# Altium PCB PCB_motor_driver.PcbDoc
Units mm, origin at the board's own origin, x right, y up, seen from the top; angles counter-clockwise.
Board outline 35.18 x 21.08 mm, 2 copper layers (Top Layer, Bottom Layer); 7 components, 8 nets, 20 pads, 2 vias.
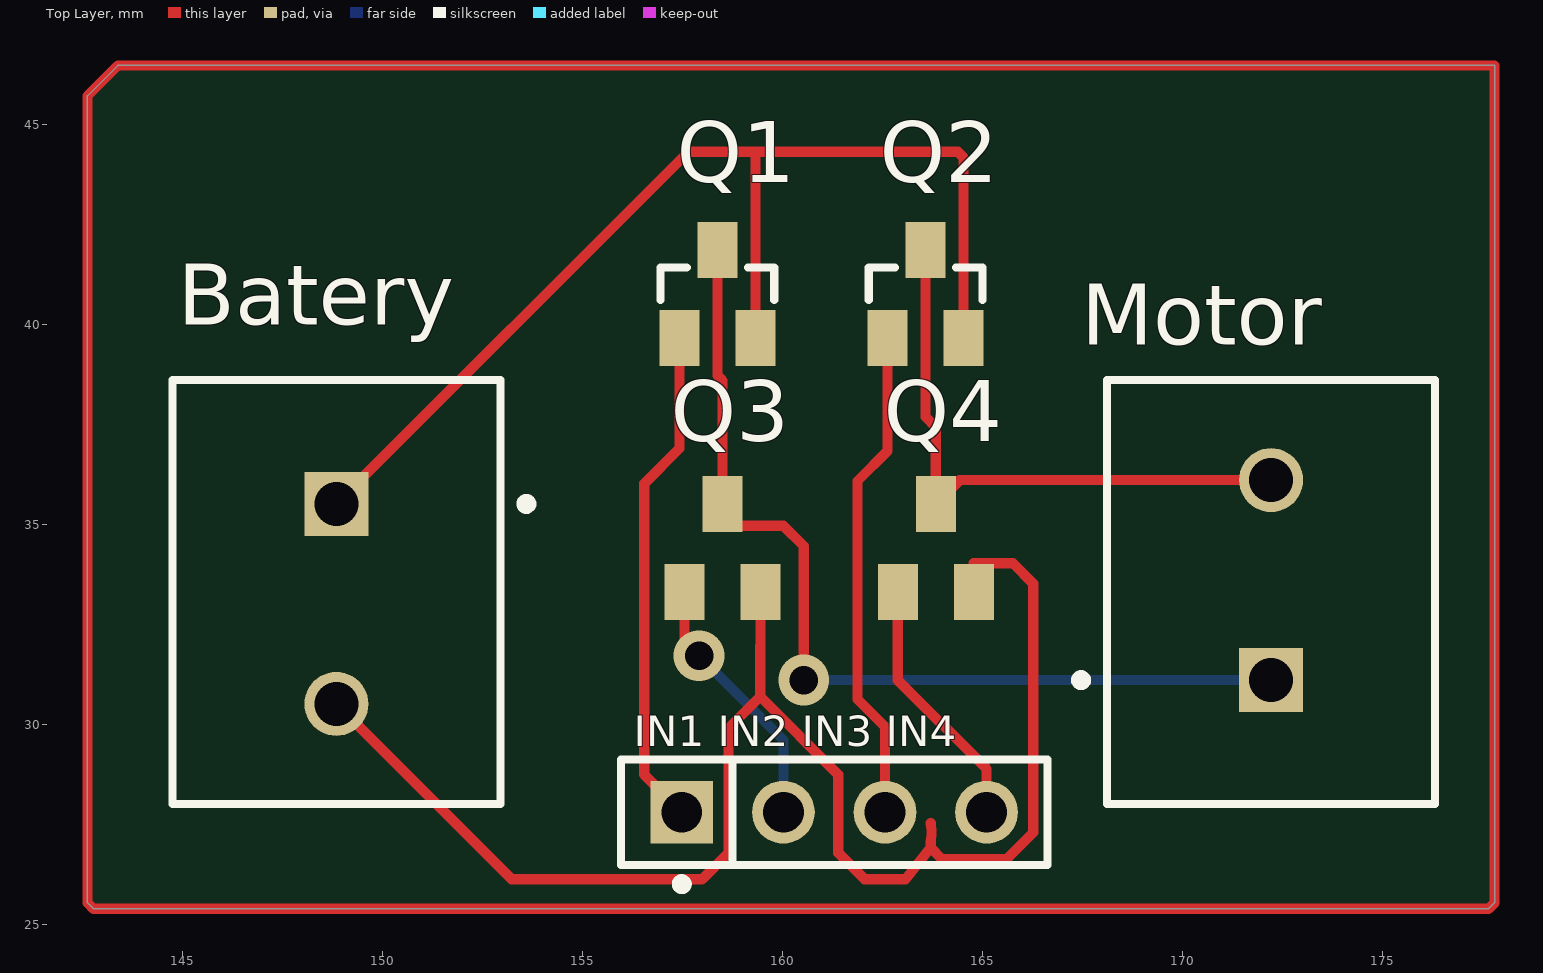
[diagram p0: Top Layer view]
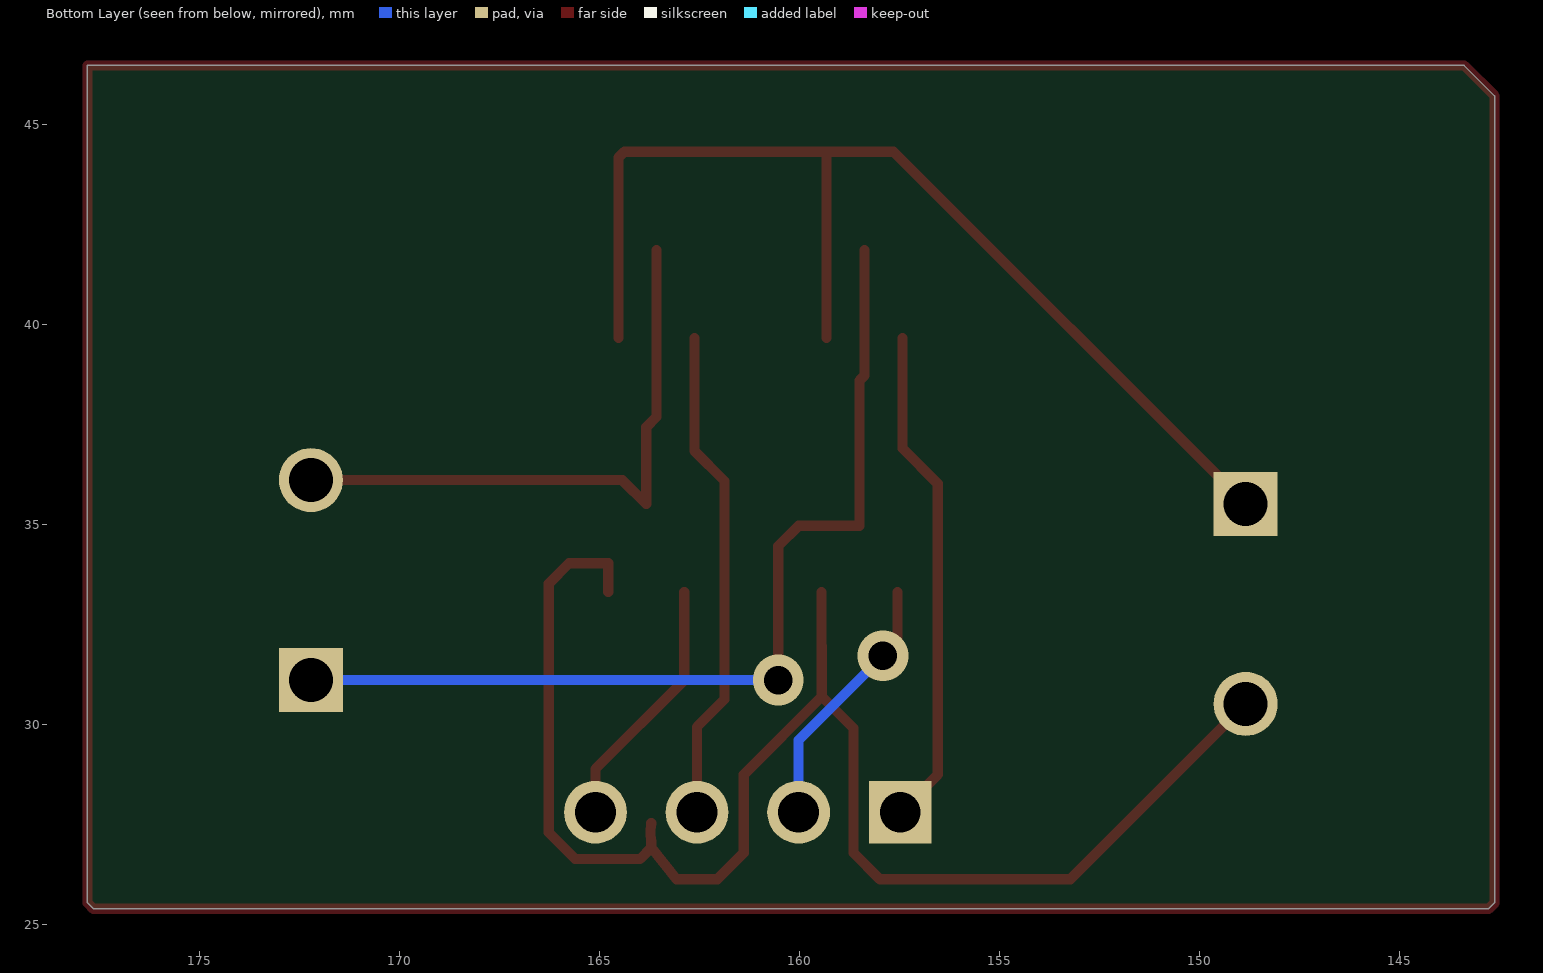
[diagram p1: Bottom Layer view, seen from below]
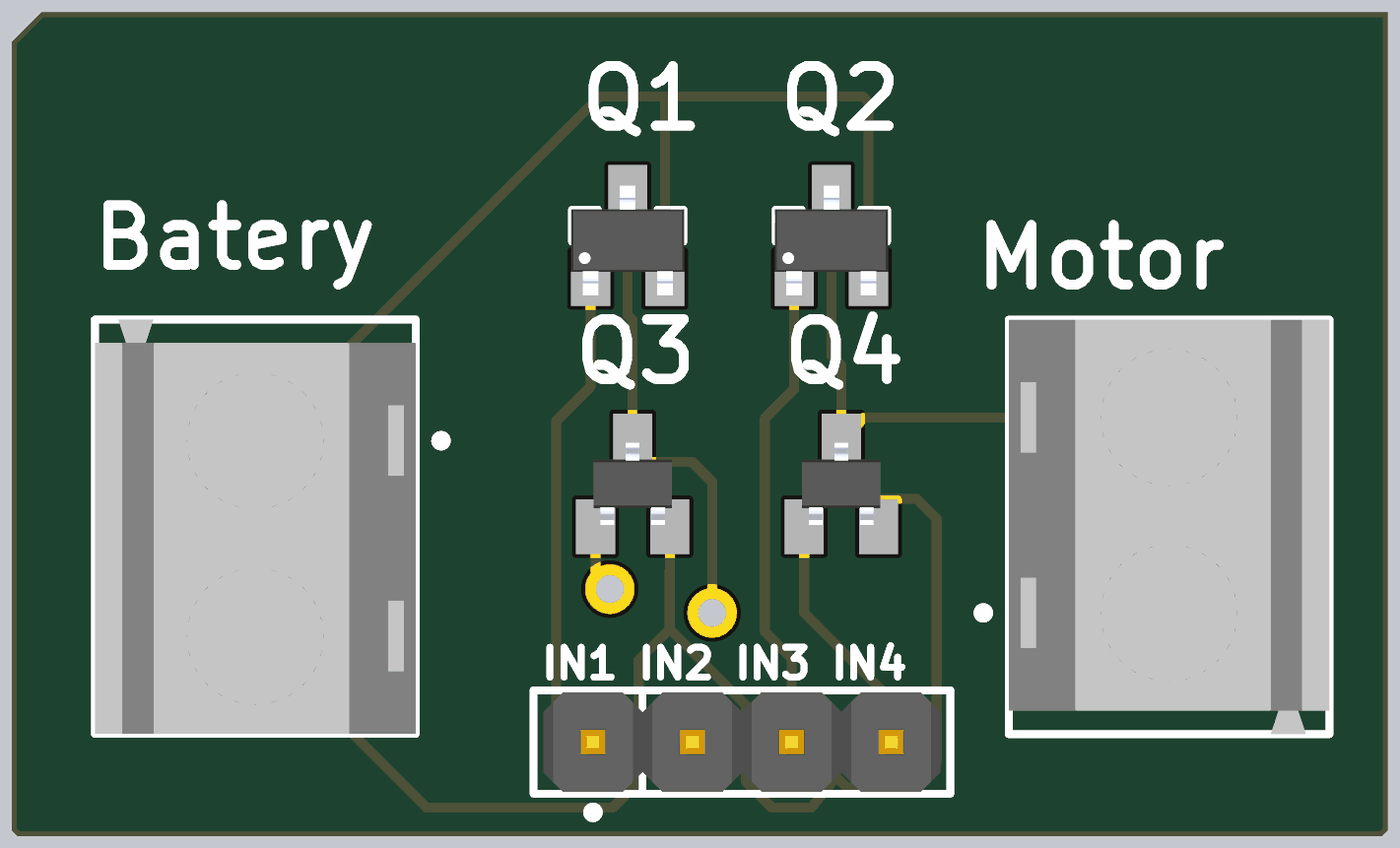
[diagram p2: 3D render of the assembled board from above, using the file's embedded part models]

## Layer stack, top to bottom
Top Solder: solder mask 0.0102, Solder Resist, Dk 3.5
Top Layer: signal copper 0.0356
Dielectric 1: dielectric 0.32, FR-4, Dk 4.8
Bottom Layer: signal copper 0.0356
Bottom Solder: solder mask 0.0102, Solder Resist, Dk 3.5

## Board outline
142.621,25.549 142.77,25.4 177.651,25.4 177.8,25.549 177.8,46.482 143.383,46.482 142.621,45.72

## Design rules (kind name [scope] priority, off if disabled: settings)
Clearance [All] p1: gap=0.254 ignorepadtopadclearanceinfootprint=FALSE
DiffPairsRouting [All] p1: maxlimit=0.2 minlimit=0.2 mostfreqgap=0.2 toplayer_minwidth=0.15 toplayer_maxwidth=0.15 toplayer_prefwidth=0.15 bottomlayer_minwidth=0.15 bottomlayer_maxwidth=0.15 bottomlayer_prefwidth=0.15 maxuncoupledlength=12.7
PolygonConnect [All] p1: connectstyle=Relief reliefconductorwidth=0.254 reliefentries=4 polygonreliefangle="90 Angle" airgapwidth=0.254
RoutingVias [All] p1: holewidth=0.711 width=1.27 viastyle="Through Hole" minholewidth=0.711 minwidth=1.27 maxholewidth=0.711 maxwidth=1.27
SolderMaskExpansion [All] p1: expansion=0.102 istentingtop=FALSE
SupplyNets "Schematic Supply Nets" [InNet('GND')] p1: voltage=0.000
Width [All] p1: maxlimit=0.254 minlimit=0.254 preferedwidth=0.254
29 further rules are at their usual default settings.

## Components (designator, comment, footprint, x,y, rotation, side; value= is the part's Value field where it differs from the comment)
Batery "282836-2" TECO-282836-2_V 148.844,33.02 r270 top
"IN1 IN2 IN3 IN4" "M20-9990445" FP-M20-9990445-MFG 161.29,27.813 r0 top (schematic designator Micro)
Motor "282836-2" TECO-282836-2_V 172.212,33.615 r90 top
Q1 "AO3401A" SOT23 158.369,40.767 r0 top
Q2 "AO3401A" SOT23 163.576,40.767 r0 top
Q3 "IRLML6344TRPBF" SOT23 158.496,34.417 r0 top
Q4 "IRLML6344TRPBF" SOT23 163.83,34.417 r0 top

## Footprints (in the part's own frame and the unit in brackets; to place one, negate y for a bottom-side part, rotate by r counter-clockwise, add the part's x,y. Pads: shape width x height; smd on the part's side, far side on the other; paste and mask are expansions set on the pad)
FP-M20-9990445-MFG [mm]
  rect 1.57x1.57 hole 1.02 paste-2539.97 mask+0: 1(-3.81,0)
  round 1.57 hole 1.02 paste-2539.97 mask+0: 2(-1.27,0) 3(1.27,0) 4(3.81,0)
  silkscreen extent -5.33,-1.92 5.33,1.32, body extent -5.43,-1.42 5.43,1.42, height 0.25
SOT23 [mm]
  rect 1x1.4 smd: 1(-0.95,-1.1) 2(0.95,-1.1) 3(0,1.1)
  silkscreen extent -1.42,-0.15 1.42,0.66, body extent -1.45,-1.53 1.45,1.27, height 1.25
TECO-282836-2_V [mm] "Female Header, Pitch 5mm, 1 x 2 Position, Height 10mm"
  rect 1.6x1.6 hole 1.1: 1(-2.5,0)
  round 1.6 hole 1.1: 2(2.5,0)
  silkscreen extent -5.6,-4.1 5,4.88, body extent -5.6,-4.1 5,4.1, height 10

## Part data
Batery Motor: library part CMP-1684-00017-1, "Female Header, Pitch 5 mm, 1 x 2 Position, Height 10 mm, Tail Length 3.5 mm, Rohs, Bulk", Color=Green, Current=13.5A, Manufacturer="TE Connectivity", Package Description="Female Header, Pitch 5 mm, 1 x 2 Position, Height 10 mm, Tail Length 3.5 mm", Package Reference=THD, Standard Package=300, Voltage=300V, 3D Model=282836-2.pdf, Category=Connectors,Interconnects, Clamp Material - Plating=Brass-NickelPlated, Contact Material - Plating=Brass-TinPlated, Datasheet URL=http://www.te.com.cn/commerce/DocumentDelivery/DDEController?Action=showdoc&DocId=Catalog+Section%7F1308389_EUROSTYLE_TERMINAL_BLOCKS%7F0607%7Fpdf%7FEnglish%7FENG_CS_1308389_EUROSTYLE_TERMINAL_BLOCKS_0607.pdf%7F282836-2, Dynamic Catalog=BuchananSeries, Family=TerminalBlocks-WiretoBoard, Featured Product=EurostyleTerminalBlockConnectors, Features=Interlocking(Side), Housing Material=Polyamide(PA66),Nylon6/6, Manufacturer URL=http://www.te.com, Mating Orientation=HorizontalwithBoard, Mounting Type=ThroughHole, Number of Levels=1, Other Names="5ULV-02B / A98076", Packaging=Bulk, Pitch="0.197\"(5.00mm)", Positions Per Level=2, Product Training Modules=Wire-to-BoardEurostyleTerminalBlocks, RoHS Information=282836-2StatementofCompliance, Screw Material - Plating=Brass-NickelPlated, Screw Thread=M3, Series=Buchanan, Torque - Screw=0.68Nm(6Lb-In), Wire Gauge=16-30AWG, Wire Termination=Screw-RisingCageClamp
"IN1 IN2 IN3 IN4": library part CMP-00671-05399696-1, "M20-9990445 Conn Unshrouded Header HDR 4 POS 2.54mm Solder ST Thru-Hole Bulk/Loose", Case/Package=SIL, Color=Black, Contact Resistance=25mΩ, Current Rating=3A, Insulation Resistance=10GΩ, Max Operating Temperature=105°C, Min Operating Temperature=-40°C, Voltage Rating (AC)=750V, Connector Type="Male Pin", Contact Material="Brass, Bronze, Gold, Nickel", Contact Mating Length=6.096mm, Contact Plating=Gold, Depth=2.54mm, Gender=Male, Height=2.54mm, Housing Color=Black, Housing Material=Nylon, Lead Pitch=2.54mm, Length=10.16mm, Max Current Rating=3A, Mount="Through Hole", NexarPartId=5399696, Number of Contacts=4, Number of Pins=4, Number of Positions=4, Number of Rows=1, Orientation=Straight, Pitch=2.54mm, Radiation Hardening=No, REACH SVHC="No SVHC", RoHS=Compliant, Termination=Solder, Voltage Rating (DC)=750V, Weight=45.359237g, Width=12.7mm
Q1 Q2: "P-Channel 30V 4A (Ta) 1.4W (Ta) Surface Mount SOT-23-3L", Package="SOT-23 Alpha &amp; Omega Semiconductor", Availability=Good, Check_prices=https://www.snapeda.com/parts/AO3401A/Alpha%20&%20Omega%20Semiconductor%20Inc./view-part/227978/?ref=eda, MF="Alpha &", MP=AO3401A, Price=None, Purchase-URL=https://pricing.snapeda.com/search/part/AO3401A/?ref=eda, SnapEDA_Link=https://www.snapeda.com/parts/AO3401A/Alpha%20&%20Omega%20Semiconductor%20Inc./view-part/227978/?ref=snap
Q3 Q4: "N-Channel 30V 5A (Ta) 1.3W (Ta) Surface Mount Micro3â„¢/SOT-23", Package="SOT-23 Multicomp", Availability="In Stock", Check_prices=https://www.snapeda.com/parts/IRLML6344TRPBF/Infineon%20Technologies/view-part/1786730/?ref=eda, MF="Infineon Technologies", MP=IRLML6344TRPBF, Price=None, Purchase-URL=https://pricing.snapeda.com/search/part/IRLML6344TRPBF/?ref=eda, SnapEDA_Link=https://www.snapeda.com/parts/IRLML6344TRPBF/Infineon%20Technologies/view-part/1786730/?ref=snap

## Via types
v1: diameter 1.27, hole 0.711, Top Layer to Bottom Layer, 2 vias

## Nets (pads, with @x,y where several pads share a name; then routed paths per layer and width w, separated by ;. In a path a pad name is that pad's centre, name@x,y a point inside that pad or via, vN(x,y) a via of type N, cw(c..) or ccw(c..) an arc to the next point about the centre after c; other vN are vias at no path point)
GND: Batery.2 Q3.2 Q4.2 | length 41.2
  Top Layer w0.254: Batery.2 153.227,26.137 157.988,26.137 158.648,26.797 158.648,29.914 159.439,30.705 ; 163.703,27.535 cw(c162.56,27.305) 163.703,27.075 163.703,26.924 ; Q4.2 164.78,34.036 165.76,34.036 166.268,33.528 166.268,27.305 165.608,26.645 163.982,26.645 163.703,26.924 ; 159.439,30.705 159.446,30.712 Q3.2 159.439,30.705 ; 159.439,30.705 161.392,28.753 161.392,26.797 162.052,26.137 163.068,26.137 163.703,26.924
IN1: "IN1 IN2 IN3 IN4.1" Q1.1 | length 12.6
  Top Layer w0.254: Q1.1 157.419,36.906 156.54,36.027 156.54,28.753 157.48,27.813
IN2: "IN1 IN2 IN3 IN4.2" Q3.1 | length 6.5
  Top Layer w0.254: Q3.1 157.546,32.09 v1(157.912,31.725)
  Bottom Layer w0.254: v1(157.912,31.725) 160.02,29.616 160.02,27.813
IN3: "IN1 IN2 IN3 IN4.3" Q2.1 | length 12.4
  Top Layer w0.254: 162.56,27.813 162.56,29.947 161.874,30.632 161.874,36.093 162.626,36.845 Q2.1
IN4: "IN1 IN2 IN3 IN4.4" Q4.1 | length 6.4
  Top Layer w0.254: Q4.1 162.88,31.115 165.1,28.895 165.1,27.813
OUT1: Motor.1 Q1.3 Q3.3 | length 24.2
  Top Layer w0.254: Q1.3 158.369,38.735 158.496,38.608 Q3.3 158.496,34.976 160.02,34.976 160.528,34.468 v1(160.528,31.115)
  Bottom Layer w0.254: v1(160.528,31.115) Motor.1
OUT2: Motor.2 Q2.3 Q4.3 | length 15.1
  Top Layer w0.254: Q2.3 163.576,37.694 163.83,37.44 Q4.3 164.428,36.115 Motor.2
VCC: Batery.1 Q1.2 Q2.2 | length 28.6
  Top Layer w0.254: Batery.1 157.648,44.324 164.377,44.324 164.526,44.175 Q2.2 ; Q1.2 159.319,44.324
copper on no net: | length 111.9
  Top Layer w0.254: 142.621,25.549 142.621,45.72 143.383,46.482 177.8,46.482 177.8,25.549 177.651,25.4 142.77,25.4 142.621,25.549